# EAGLE board HSHV4-student version (EAGLE 7.7.0)
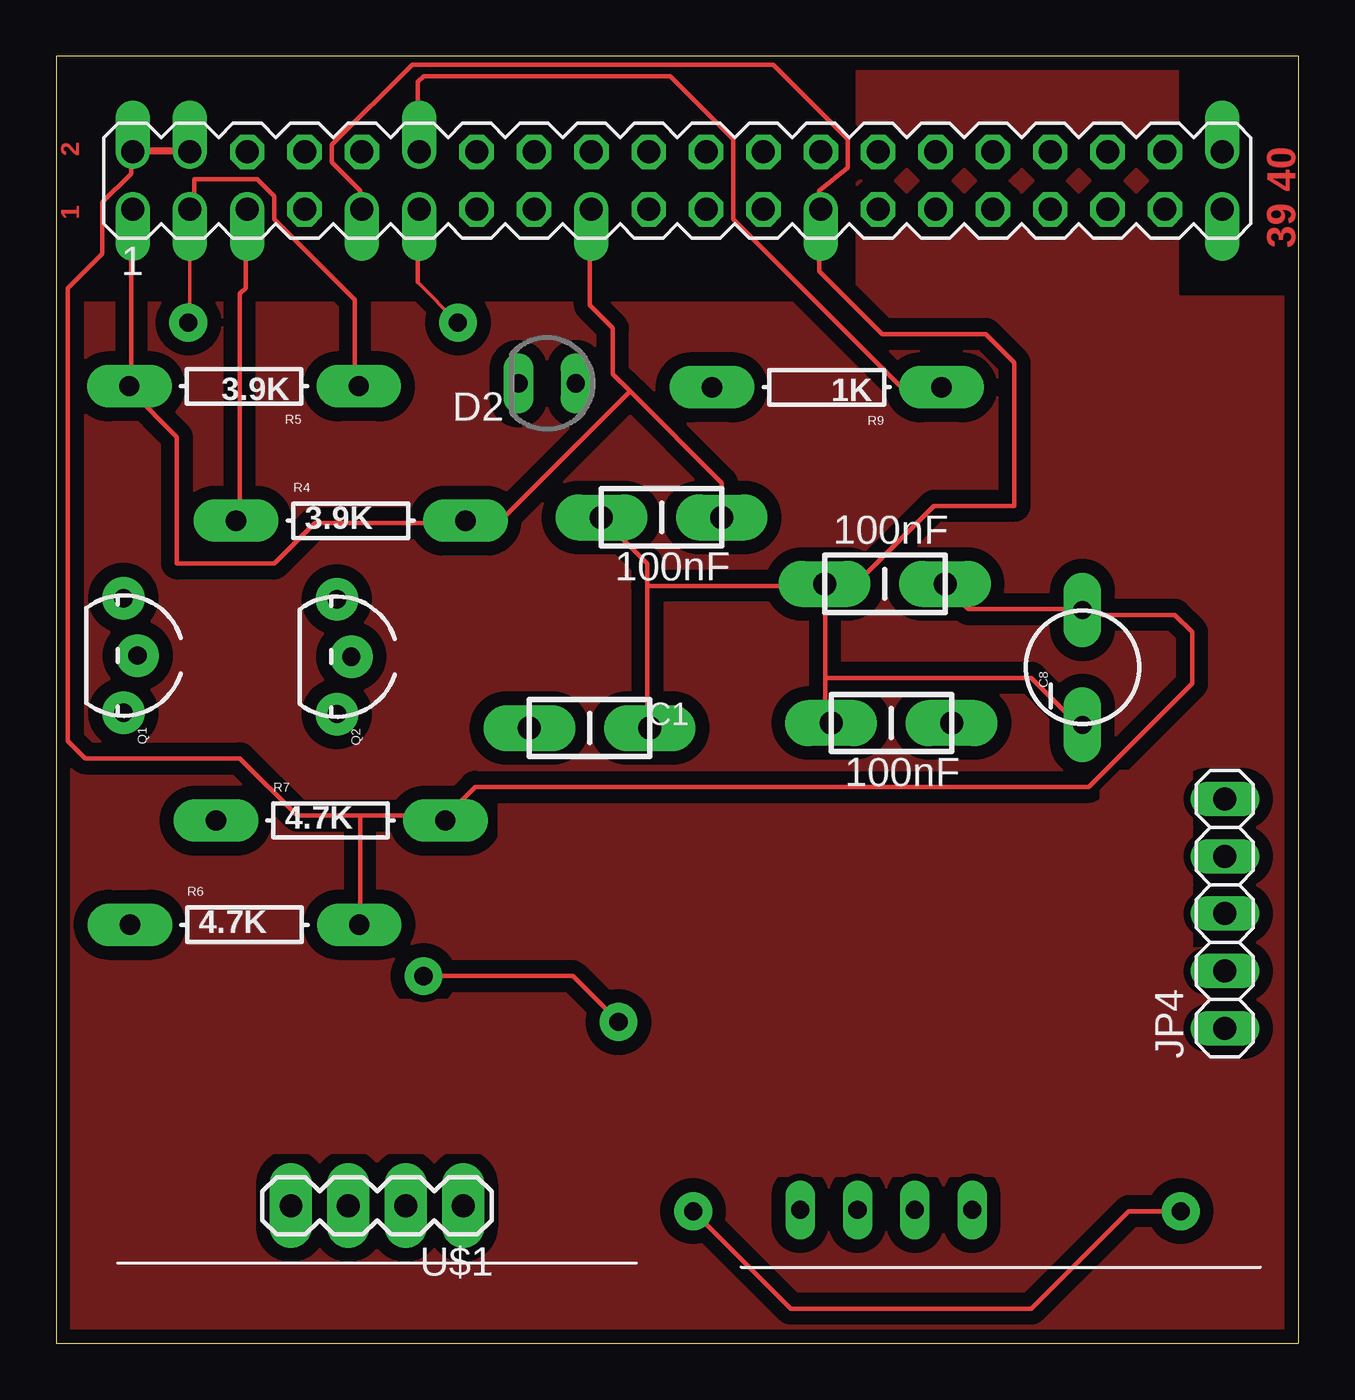
[diagram p0: board, top side]
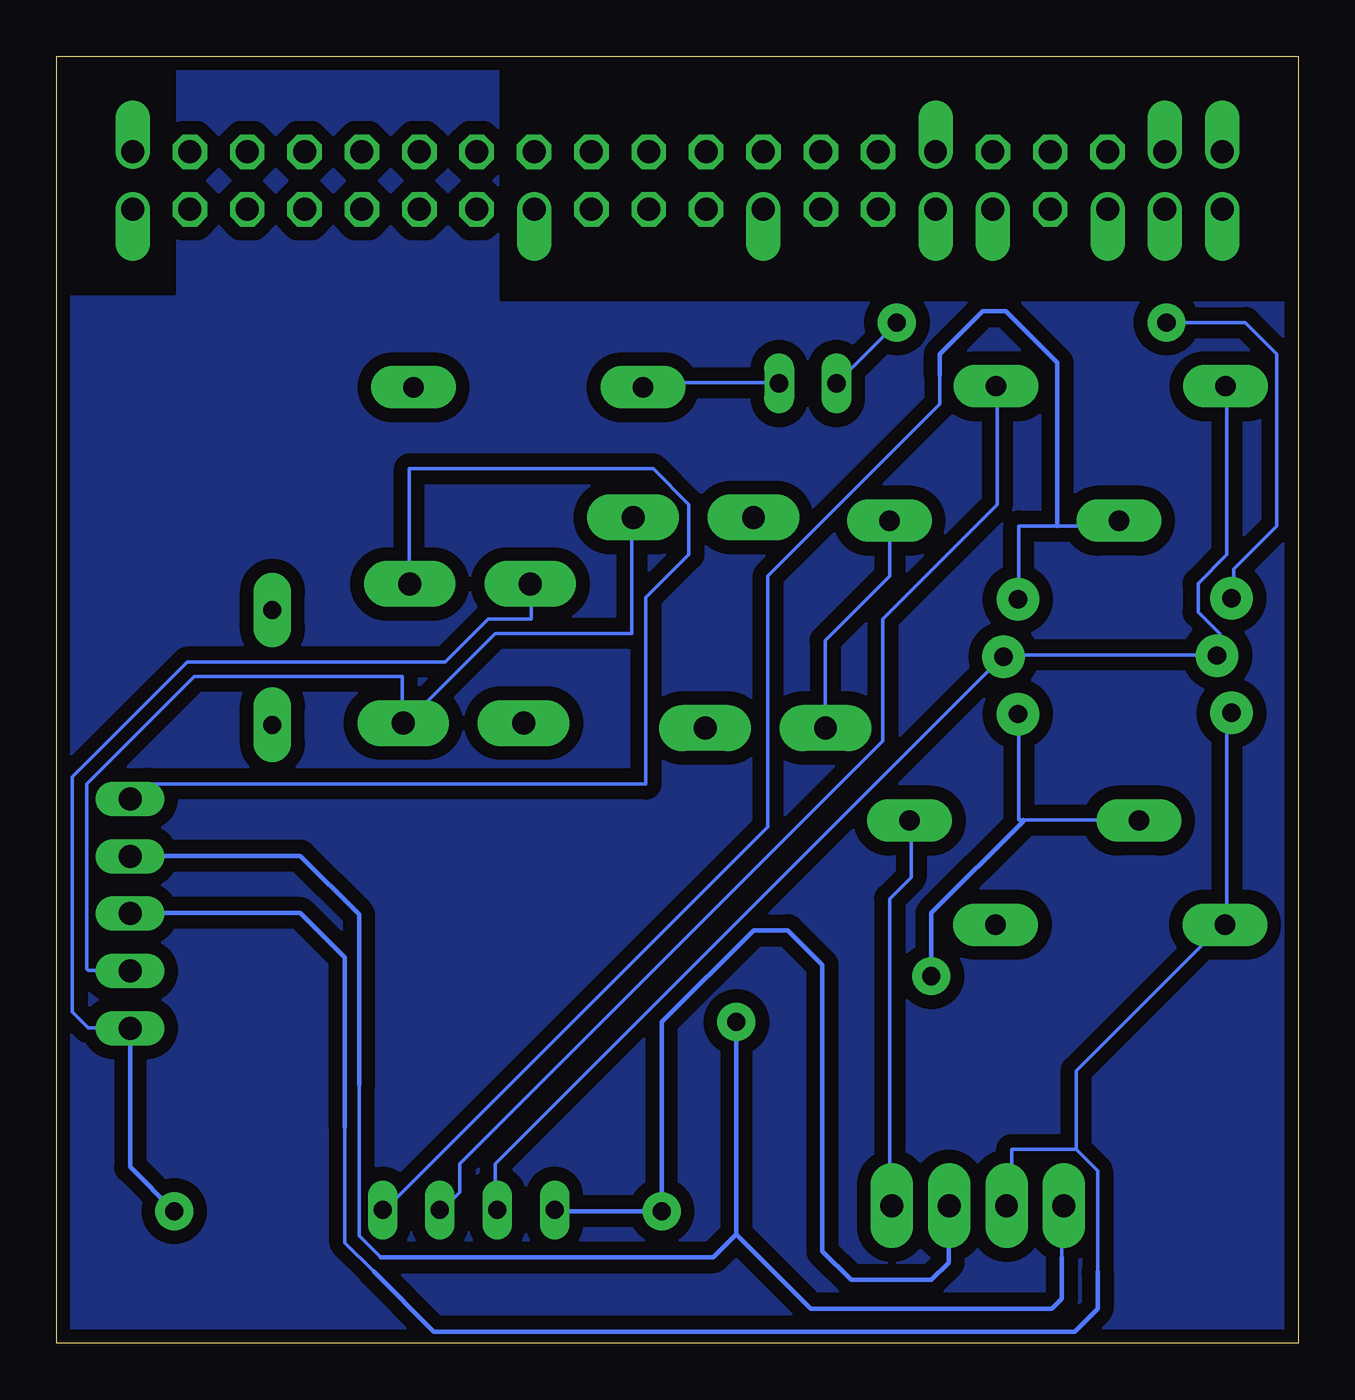
[diagram p1: board, bottom side, seen from below]

Size 55 x 57 mm. Coordinates in mm from the lower left corner, seen from the top.
Outline: 0,0 55,0 55,57 0,57 0,0
Copper layers (1*16): Top 0.035mm / dielectric 1.5mm / Bottom 0.035mm
Design rules "ITEADstudio_DRC *": minimum track width 6mil, minimum drill 0.8mm, track to track 12mil, track to pad 12mil, pad to pad 12mil, via to via 12mil, smd to smd 0mil, copper to edge 10mil, drill to drill 10mil, minimum pad ring 10mil, minimum via ring 12mil, stop-mask expansion 2mil, vias tented up to drill 100mil, thermal gap 10mil

## Footprints (pad centres in the part's own frame; a part is rotated, then mirrored left to right if it is on the bottom)
CAP-PTH-SMALL-KIT = drill 1.016 pad 2.032 long: 1 -2.667,0; 2 2.667,0
CPOL-RADIAL-10UF-25V = drill 0.8 pad 1.651 long: 1 2.54,0; 2 -2.54,0
LED3MM-NS = drill 0.813 long: A -1.27,0; K 1.27,0
8PTH = drill 0.8 pad 1.27 long: 1 -3.81,0; 2 -1.27,0; 3 1.27,0; 4 3.81,0
1X05 = drill 1.016 long: 1 -5.08,0; 2 -2.54,0; 3 0,0; 4 2.54,0; 5 5.08,0
PIN_20X2 = drill 1.016 offset: 1 -24.13,-1.27; 2 -24.13,1.27; 3 -21.59,-1.27; 4 -21.59,1.27; 5 -19.05,-1.27; 9 -13.97,-1.27; 11 -11.43,-1.27; 12 -11.43,1.27; 17 -3.81,-1.27; 25 6.35,-1.27; 39 24.13,-1.27; 40 24.13,1.27 | drill 1.016 octagon: 6 -19.05,1.27; 7 -16.51,-1.27; 8 -16.51,1.27; 10 -13.97,1.27; 13 -8.89,-1.27; 14 -8.89,1.27; 15 -6.35,-1.27; 16 -6.35,1.27; 18 -3.81,1.27; 19 -1.27,-1.27; 20 -1.27,1.27; 21 1.27,-1.27; 22 1.27,1.27; 23 3.81,-1.27; 24 3.81,1.27; 26 6.35,1.27; 27 8.89,-1.27; 28 8.89,1.27; 29 11.43,-1.27; 30 11.43,1.27; 31 13.97,-1.27; 32 13.97,1.27; 33 16.51,-1.27; 34 16.51,1.27; 35 19.05,-1.27; 36 19.05,1.27; 37 21.59,-1.27; 38 21.59,1.27
TO-92 = drill 0.813 pad 1.88: 1 -2.54,0; 2 0,0.635; 3 2.54,0
AXIAL-0.3 = drill 0.9 pad 1.88 long: P$1 -5.08,0; P$2 5.08,0
1X04 = drill 1.016 pad 1.88 long: 1 -3.81,0; 2 -1.27,0; 3 1.27,0; 4 3.81,0

## Placement (x,y rotation side)
C1  100nF  [CAP-PTH-SMALL-KIT]  23.61,27.25 0 top
C2  100nF  [CAP-PTH-SMALL-KIT]  36.98,27.47 180 top
C4  100nF  [CAP-PTH-SMALL-KIT]  26.8,36.58 0 top
C5  100nF  [CAP-PTH-SMALL-KIT]  36.69,33.63 0 top
C8  10uF  [CPOL-RADIAL-10UF-25V]  45.44,29.93 90 top
D2  [LED3MM-NS]  21.73,42.51 180 top
IC1  DS3231  [8PTH]  36.75,5.9 0 top
JP4  [1X05]  51.74,19.03 90 top
K1  PIN20X2  [PIN_20X2]  27.5,51.5 0 top
Q1  MOSFET-NCHANNEL2N7000  [TO-92]  2.96,30.46 270 top
Q2  MOSFET-NCHANNEL2N7000  [TO-92]  12.42,30.41 270 top
R4  3.9K  [AXIAL-0.3]  13.03,36.43 0 top
R5  3.9K  [AXIAL-0.3]  8.31,42.39 180 top
R6  4.7K  [AXIAL-0.3]  8.33,18.53 0 top
R7  4.7K  [AXIAL-0.3]  12.14,23.15 0 top
R9  1K  [AXIAL-0.3]  34.11,42.34 180 top
U$1  PCF8591  [1X04]  14.2,6.08 180 top

## Library data of the parts
C1 C2 C4 C5 = SparkFun-Capacitors; DIELECTRIC: X7R; PROD_ID: CAP-08370
C8 = SparkFun-Capacitors; DIELECTRIC: X7R; PROD_ID: CAP-08440
D2 = SparkFun-LED
IC1 U$1 = SenseHat
JP4 = pinhead
K1 = FLYFISH
Q1 Q2 = SparkFun-DiscreteSemi
R4-R7 R9 = SparkFun-Resistors; PROD_ID: RES-12182; TOLERANCE: 5%

## Nets
+3V3: C1.1 C2.1 C4.2 IC1.2 JP4.2 K1.1 K1.17 Q1.2 Q2.2 R4.P$2 R5.P$2
+5V: C5.2 C8.1 JP4.5 K1.2 K1.4 R6.P$2 R7.P$2 U$1.1
GND: C1.2 C2.2 C4.1 C5.1 C8.2 IC1.1 JP4.1 K1.9 K1.25 U$1.2
GPIO17: D2.K K1.11
GPIO18: K1.12 R9.P$1
N$2: D2.A R9.P$2
SCL1-3: IC1.4 K1.5 Q2.1 R4.P$1
SCL1-5: JP4.4 Q2.3 R7.P$1 U$1.4
SDA1-3: IC1.3 K1.3 Q1.1 R5.P$1
SDA1-5: JP4.3 Q1.3 R6.P$1 U$1.3

## Tracks (layer width: path | path; a pad name or v marks a point on that pad's centre or on a via)
+3V3
  Top 0.203: C4.2 29.46,38.1 25.4,42.16 | 25.4,42.16 24.64,42.93 24.64,44.96 23.62,45.97 23.62,50.16 K1.17 | K1.1 3.3,50.04 3.3,42.42 R5.P$2 3.3,42.16 5.33,40.13 5.33,34.54 9.65,34.54 11.43,36.32 18.03,36.32 R4.P$2 18.29,36.58 19.81,36.58 25.4,42.16
  Bottom 0.152: IC1.2 35.56,6.03 35.56,7.94 13.34,30.16 Q2.2 13.02,30.48 3.81,30.48 Q1.2 3.49,30.48 3.49,31.43 4.45,32.38 4.45,33.66 3.17,34.92 3.17,42.23 R5.P$2 | C1.1 20.95,27.3 20.95,31.11 18.1,33.97 18.1,36.2 R4.P$2 | C4.2 29.53,36.51 29.53,31.43 35.56,31.43 39.37,27.62 C2.1 39.69,27.62 39.69,29.53 48.9,29.53 53.66,24.77 53.66,16.57 53.59,16.51 51.76,16.51
  Bottom 0.203: 51.76,16.51 JP4.2
+5V
  Top 0.203: K1.2 3.3,52.58 3.3,51.82 2.03,50.55 2.03,48.26 0.51,46.74 0.51,26.67 1.27,25.91 8.13,25.91 10.67,23.37 13.46,23.37 | 13.46,23.37 17.02,23.37 R7.P$2 17.27,23.37 18.54,24.64 45.72,24.64 50.29,29.21 50.29,31.5 49.53,32.26 45.47,32.26 C8.1 45.21,32.51 40.39,32.51 39.37,33.53 C5.2 | 13.46,23.37 13.46,18.54 R6.P$2
  Top 0.305: K1.4 5.84,52.83 3.56,52.83 K1.2
  Bottom 0.152: JP4.5 51.44,24.13 50.8,24.77 28.89,24.77 28.89,33.02 26.99,34.92 26.99,37.15 28.57,38.73 39.37,38.73 39.37,33.66 C5.2 | U$1.1 18.1,6.35 18.1,19.68 17.14,20.64 17.14,22.86 R7.P$2
GND  (via drill 0.8 pad 1.68)
  Top 0.203: 26.16,33.53 26.16,34.54 C4.1 | 26.16,33.53 26.16,27.43 C1.2 | 26.16,33.53 33.78,33.53 C5.1 | 34.04,29.46 34.04,27.94 34.29,27.69 C2.2 | 34.04,29.46 34.04,33.53 C5.1 | 34.04,29.46 43.18,29.46 45.21,27.43 C8.2 | C5.1 34.04,33.78 35.56,33.78 38.86,37.08 42.42,37.08 42.42,43.43 41.15,44.7 36.58,44.7 33.78,47.5 33.78,50.16 K1.25 33.79,50.29 33.78,50.29 33.78,51.05 35.05,52.07 35.05,53.34 31.75,56.64 15.75,56.64 12.19,53.09 12.19,52.32 13.46,51.05 13.46,50.29 13.47,50.29 K1.9 | v49.78,5.84 47.5,5.84 43.18,1.52 32.51,1.52 v28.19,5.84
  Bottom 0.152: 51.75,13.97 JP4.1 | C5.1 33.97,33.34 33.97,32.07 35.88,32.07 37.78,30.16 49.21,30.16 54.29,25.08 54.29,14.67 53.59,13.97 51.76,13.97
  Bottom 0.203: v49.78,5.84 51.74,7.8 JP4.1 51.76,13.97 | IC1.1 32.88,5.84 v28.19,5.84 28.19,14.22 24.13,18.29 22.61,18.29 21.08,16.76 21.08,4.06 19.81,2.79 16.26,2.79 15.49,3.56 15.49,6.05 U$1.2
GPIO17  (via drill 0.8 pad 1.68)
  Top 0.152: 16,46.99 v17.78,45.21
  Top 0.203: 16,46.99 16,50.16 K1.11
  Bottom 0.152: v17.78,45.21 17.78,45.19 D2.K
GPIO18
  Top 0.203: R9.P$1 39.12,42.42 37.34,42.42 29.97,49.78 29.97,53.34 27.18,56.13 16.26,56.13 16,55.88 16,52.84 K1.12
N$1
  pour Bottom (isolate 0.61): 0,56.9 55.12,56.9 55.12,0 0,0
N$2
  Bottom 0.152: D2.A 23.18,42.55 28.89,42.55 R9.P$2
N$3
  pour Top (isolate 0.61): 0,56.9 55.12,56.9 55.12,0 0,0
  pour Top: 19.56,23.88 50.29,23.88 50.29,17.02 19.56,17.02
  pour Top: 46.23,25.4 50.29,25.4 50.29,22.86 46.23,22.86
  pour Top: 44.96,17.53 51.05,17.53 51.05,10.67 44.96,10.67
  pour Top: 30.73,14.99 42.67,14.99 42.67,7.37 30.73,7.37
  pour Top: 8.13,15.24 20.57,15.24 20.57,8.38 8.13,8.38
N$4
  cutout Top (isolate 0.813): 49.78,56.9 54.36,56.9 54.36,46.48 49.78,46.48
  cutout Bottom (isolate 0.813): 49.78,56.9 54.36,56.9 54.36,46.48 49.78,46.48
N$5
  cutout Top (isolate 0.813): 0,56.9 35.31,56.9 35.31,46.23 0,46.23
  cutout Bottom (isolate 0.813): 0,56.9 35.31,56.9 35.31,46.23 0,46.23
SCL1-3
  Top 0.203: R4.P$1 8.13,36.58 8.13,46.48 8.38,46.74 8.38,50.16 K1.5
  Bottom 0.152: R4.P$1 8.26,36.2 10.67,36.2 12.38,36.2 12.38,33.02 Q2.1 | 15.88,42.86 15.88,41.59 23.5,33.97 23.5,22.86 40.32,6.03 IC1.4
  Bottom 0.203: 15.88,42.86 15.88,43.81 13.97,45.72 12.95,45.72 10.67,43.43 10.67,36.2
SCL1-5  (via drill 0.8 pad 1.68)
  Top 0.203: v16.26,16.26 22.86,16.26 v24.89,14.22
  Bottom 0.152: R7.P$1 7.3,23.18 12.19,23.18 12.38,23.18 12.38,27.62 Q2.3 | 41.59,11.43 41.59,4.76 40.64,3.81 | 10.48,3.81 10.48,6.03 U$1.4
  Bottom 0.203: v16.26,16.26 16.26,19.05 12.19,23.11 12.19,23.18 | v24.89,14.22 24.89,4.83 | 10.48,3.81 10.48,1.97 10.92,1.52 21.59,1.52 24.89,4.83 | 40.64,3.81 25.91,3.81 24.89,4.83 | 41.59,11.43 41.59,18.99 44.2,21.59 51.72,21.59 JP4.4
SDA1-3  (via drill 0.8 pad 1.68)
  Top 0.152: K1.3 5.91,45.28 v5.84,45.21
  Top 0.203: R5.P$1 13.21,42.42 13.21,46.23 9.65,49.78 9.65,50.8 8.89,51.56 6.1,51.56 6.1,50.29 K1.3
  Bottom 0.152: IC1.3 37.78,6.03 37.15,6.67 37.15,7.94 18.41,26.67 18.41,32.07 13.34,37.15 13.34,42.23 R5.P$1 | Q1.1 2.86,33.02 2.86,34.29 0.95,36.2 0.95,43.81 2.35,45.21 v5.84,45.21 | 6.03,50.16 K1.3
SDA1-5
  Bottom 0.152: Q1.3 3.17,27.62 3.17,18.73 R6.P$1 3.49,18.41 9.84,12.06 9.84,8.57 | 42.23,9.53 42.23,4.45 40.96,3.17 | 8.89,3.17 8.89,7.62 9.84,8.57 | 9.84,8.57 12.7,8.57 12.7,6.35 U$1.3
  Bottom 0.203: 8.89,3.17 8.89,1.52 9.91,0.51 38.29,0.51 40.96,3.17 | 42.23,9.53 42.23,17.08 44.2,19.05 51.72,19.05 JP4.3

## Text on the board
Top: 2 | 1 | 39 40
tRestrict: 5V | SCL | SDA | VCC | DS-RTC | GND | PCF - ADC | GND | VCC | SDA | SCL | SCL | SDA | GND | VCC